# Altium PCB PCB2.PcbDoc
Units mm, origin at the board's own origin, x right, y up, seen from the top; angles counter-clockwise.
Board outline 100 x 120 mm, 2 copper layers (Top Layer, Bottom Layer); 99 components, 94 nets, 331 pads, 139 vias.
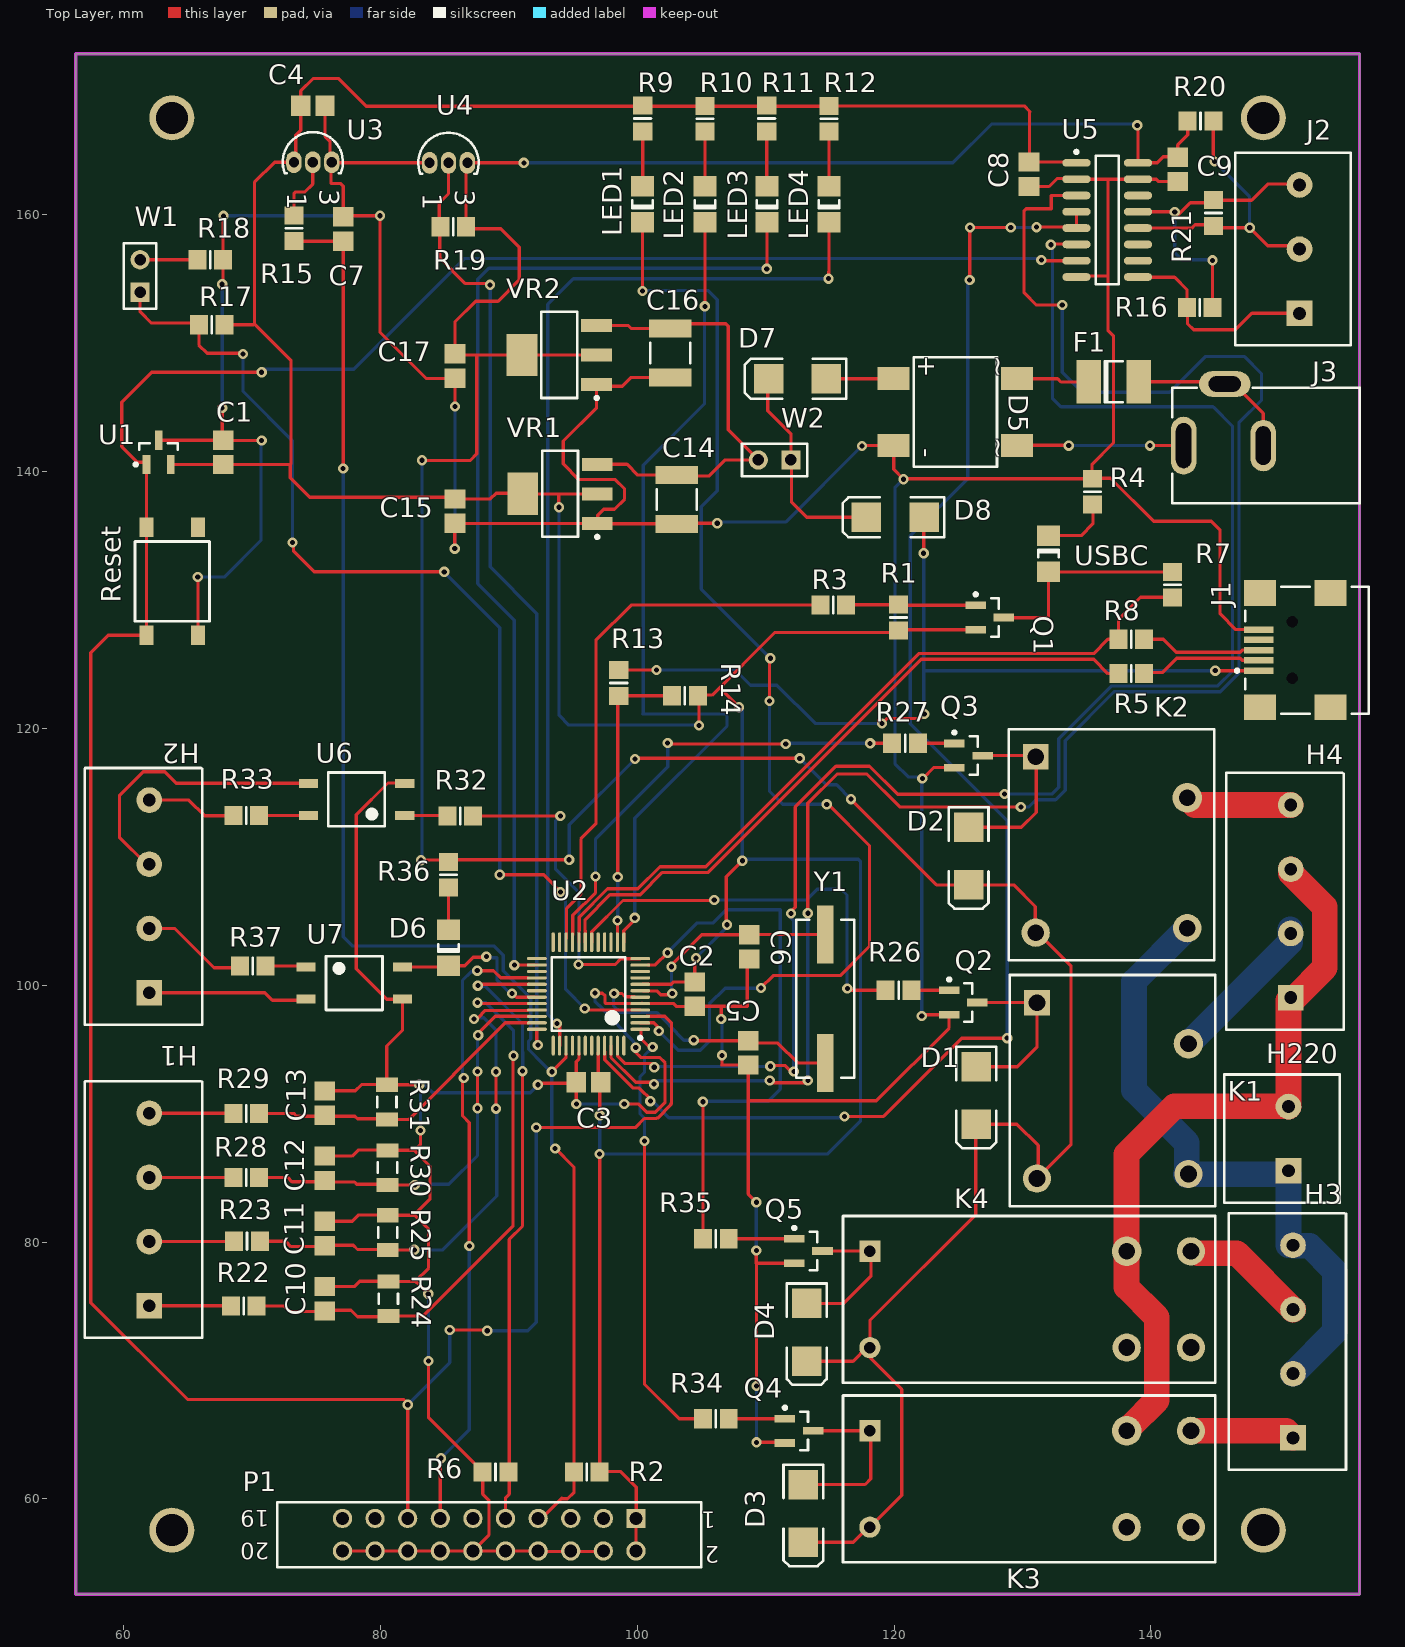
[diagram p0: Top Layer view]
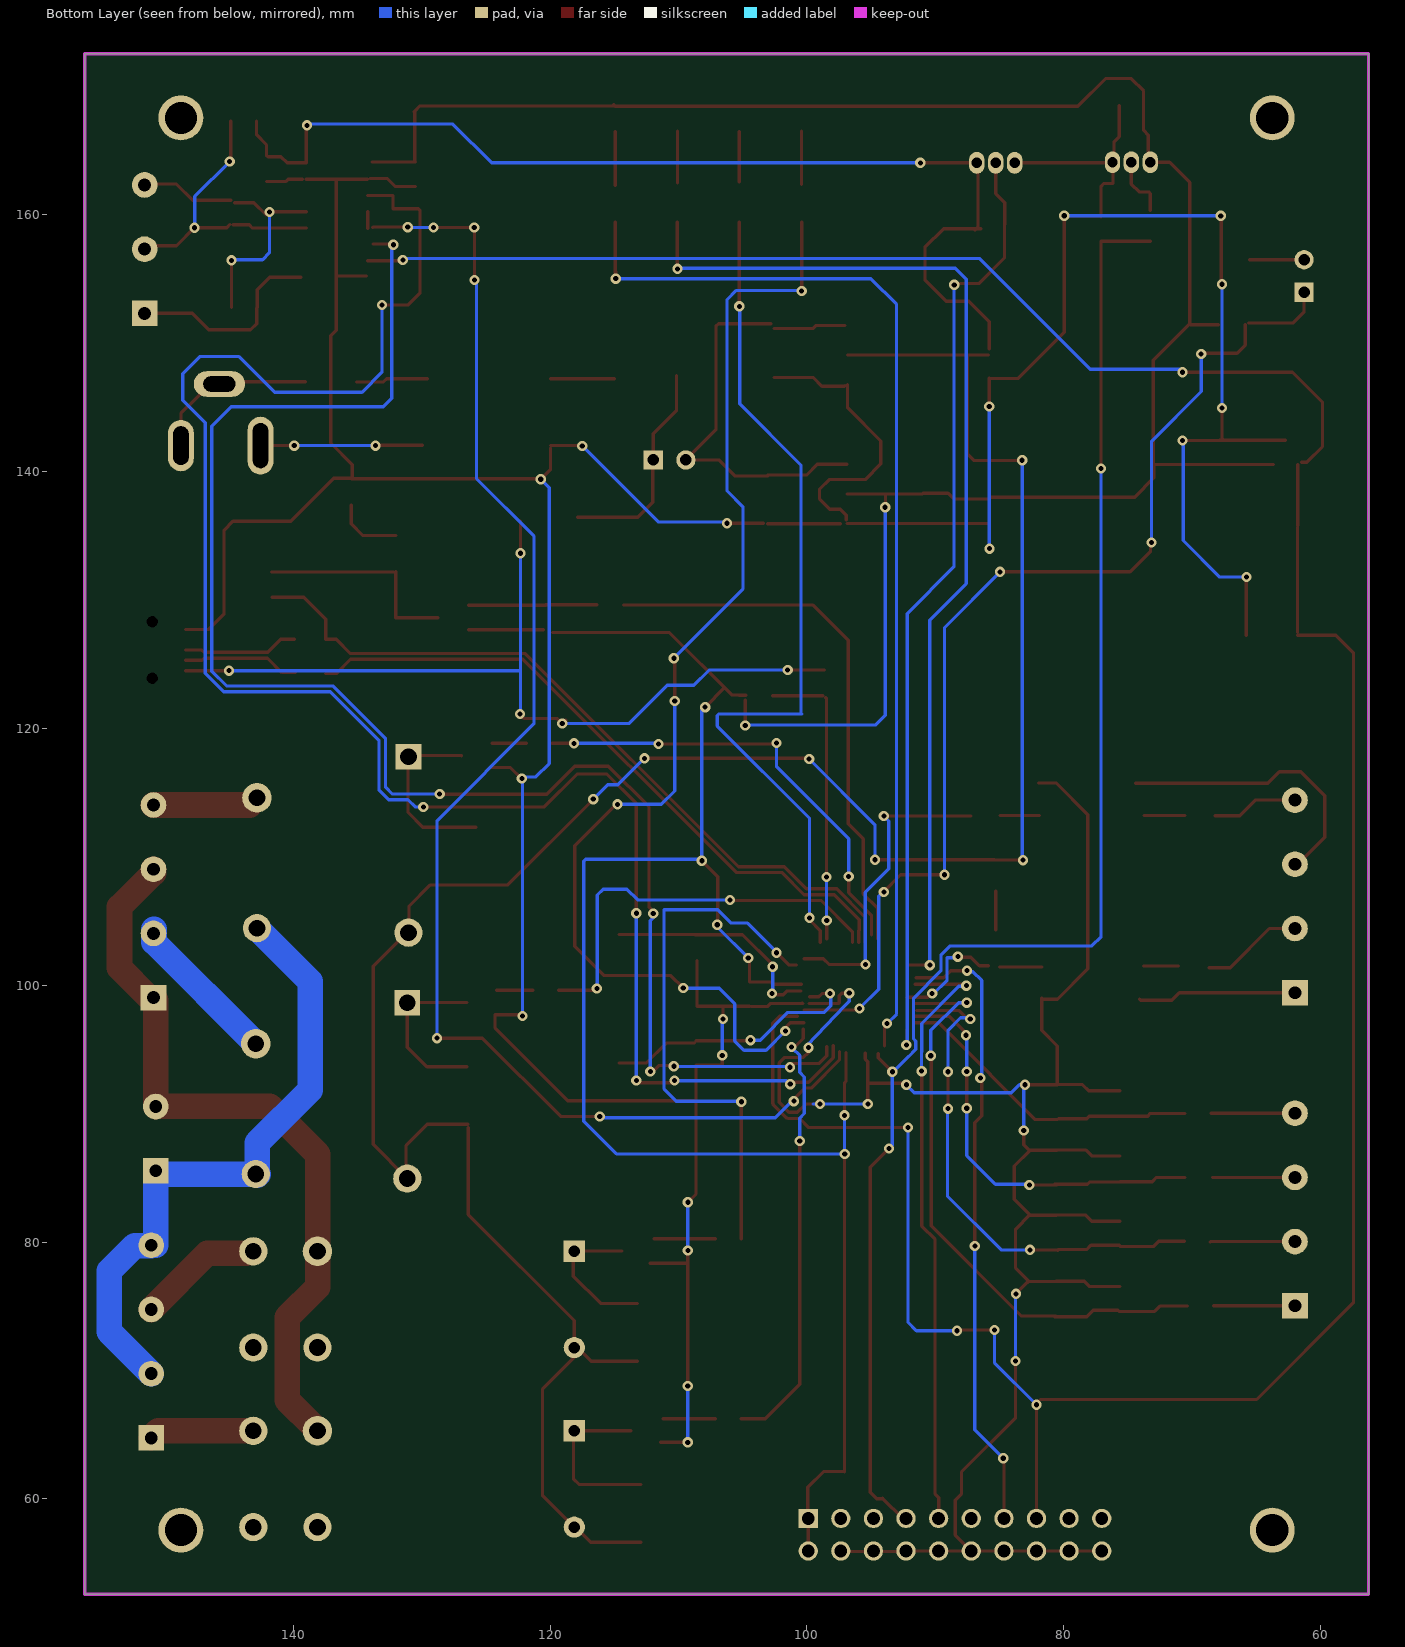
[diagram p1: Bottom Layer view, seen from below]

## Layer stack, top to bottom
Top Layer: signal copper 0.0356
Dielectric: dielectric 0.32, FR-4, Dk 4.8
Bottom Layer: signal copper 0.0356

## Board outline
56.253,52.566 56.253,172.566 156.253,172.566 156.253,52.566

## Design rules (kind name [scope] priority, off if disabled: settings)
AcuteAngle [All] p1: minimum=6.00000000000000E+0001
Clearance [All] p1: gap=0.2
DiffPairsRouting [(InNet('D_N') AND InNet('D_P'))] p1: maxlimit=0.254 minlimit=0.254 mostfreqgap=0.254 maxuncoupledlength=12.7
Height [All] p1: minheight=0 maxheight=26 prefheight=12.7
HoleSize [All] p1: absolutevalues=TRUE maxlimit=4.5 minlimit=0.4 maxpercent=80.000 minpercent=20.000
MinimumAnnularRing [All] p1: minimumring=0.2
MinimumSolderMaskSliver [All] p1: minsoldermaskwidth=0.1
PlaneClearance [All] p1: clearance=0.5
PolygonConnect [All] p1: connectstyle=Relief reliefconductorwidth=0.254 reliefentries=4 polygonreliefangle="90 Angle"
RoutingVias [All] p1: holewidth=0.5 width=0.9 viastyle="Through Hole" minholewidth=0.4 minwidth=0.8 maxholewidth=0.7 maxwidth=2.54
SilkToSilkClearance [All] p1 off: silktosilkclearance=0.254
SilkscreenOverComponentPads [All] p1 off: minsilkscreentomaskgap=0.254
SolderMaskExpansion [All] p1: expansion=0.2
ViasUnderSMD [All] p1: allowed=FALSE
Width 220V_relay [InNetClass('220V_r')] p1: maxlimit=2 minlimit=2 preferedwidth=2
Width "Power, GND nets" [(InNet('+3.3V') AND InNet('GND') AND InNet('GND485') AND InNet('VBUS') AND InNet('VCC5') AND InNet('VCC33'))] p2: maxlimit=0.4 minlimit=0.4 preferedwidth=0.4
Width [All] p3: maxlimit=0.254 minlimit=0.254 preferedwidth=0.254
21 further rules are at their usual default settings.

## Classes and differential pairs
net class 220V_r: H3_2 H4_1 NetH3_1 NetH3_3 NetH4_2 NetH4_4
component class Slave_Sheet2: C10 C11 C12 C13 C14 C15 C16 C17 D1 D2 D3 D4 D5 D6 D7 D8 F1 J3 K1 K2 K3 K4 Q2 Q3 Q4 Q5 R22 R23 R24 R25 R26 R27 R28 R29 R30 R31 R32 R33 R34 R35 R36 R37 U6 U7 VR1 VR2 W2
component class Sheet1: C1 C2 C3 C4 C5 C6 C7 C8 C9 H1 H2 H3 H4 H220 J1 J2 LED1 LED2 LED3 LED4 P1 Q1 R1 R2 R3 R4 R5 R6 R7 R8 R9 R10 R11 R12 R13 R14 R15 R16 R17 R18 R19 R20 R21 Reset U1 U2 U3 U4 U5 USBC W1 Y1
differential pair D2: +D2_P -D2_N
differential pair D1: +D1_P -D1_N

## Components (designator, comment, footprint, x,y, rotation, side; value= is the part's Value field where it differs from the comment)
C1 "Cap Semi" CAPC2012M 67.752,141.513 r270 top
C2 "Cap Semi" CAPC2012M 104.47,99.314 r90 top
C3 "Cap Semi" CAPC2012M 96.2,92.46 r0 top
C4 "Cap Semi" CAPC2012M 74.727,168.504 r180 top
C5 "Cap Semi" CAPC2012M 108.636,94.742 r90 top
C6 "Cap Semi" CAPC2012M 108.712,102.997 r90 top
C7 "Cap Semi" CAPC2012M 77.087,158.911 r270 top
C8 "Cap Semi" CAPC2012M 130.505,163.17 r270 top
C9 "Cap Semi" CAPC2012M 142.088,163.551 r90 top
C10 "Cap Semi" CAPC2012M 75.641,75.59 r270 top
C11 "Cap Semi" CAPC2012M 75.641,80.67 r270 top
C12 "Cap Semi" CAPC2012M 75.641,85.75 r270 top
C13 "Cap Semi" CAPC2012M 75.641,90.83 r270 top
C14 "Cap Pol3" CAPC4532L 103.073,137.846 r270 top
C15 "Cap Semi" CAPC2012M 85.801,136.931 r90 top
C16 "Cap Pol3" CAPC4532L 102.565,149.25 r270 top
C17 "Cap Semi" CAPC2012M 85.801,148.234 r90 top
D1 "SMBJ5.0CA" SMB 126.399,91.425 r270 top
D2 "SMBJ5.0CA" SMB 125.799,110.067 r270 top
D3 "SMBJ5.0CA" SMB 112.936,58.872 r270 top
D4 "SMBJ5.0CA" SMB 113.194,72.976 r270 top
D5 "Bridge1" DB-1S 124.765,144.653 r90 top
D6 "LED2" CD3216-1206 85.293,102.914 r270 top
D7 "SMBJ5.0CA" SMB 112.471,147.244 r180 top
D8 "SMBJ5.0CA" SMB 120.091,136.449 r180 top
F1 "Fuse 2" CD4532-1812 137.109,147.015 r180 top
H1 "Klemnik4_my" Klemnik4_5mm 65.989,72.542 r90 top
H2 "Klemnik4_my" Klemnik4_5mm 65.989,96.926 r90 top
H3 "Klemnik4_my" Klemnik4_5mm 155.067,62.255 r90 top
H4 "Klemnik4_my" Klemnik4_5mm 154.889,96.545 r90 top
H220 "Header 2" Klemnik2_5mm 154.711,83.058 r90 top
J1 "USB-B" "MINI USB" 156.253,126.111 r0 top
J2 "CON3" Klemnik3_5mm 155.577,149.838 r90 top
J3 "PWR2.5" KLD-0202 156.253,142.037 r180 top
K1 "Relay-5VDC-10A" TRCF-SB 137.023,91.803 r270 top
K2 "Relay-5VDC-10A" TRCF-SB 136.931,110.953 r270 top
K3 "Relay-5VDC-16A" TRIH-AE 130.518,61.554 r0 top
K4 "Relay-5VDC-16A" TRIH-AE 130.518,75.536 r0 top
LED1 "LED2" CD3216-1206 100.408,160.84 r270 top
LED2 "LED2" CD3216-1206 105.263,160.84 r270 top
LED3 "LED2" CD3216-1206 110.093,160.84 r270 top
LED4 "LED2" CD3216-1206 114.923,160.84 r270 top
P1 "JTAG20" JTAG_SWD_2.54 99.896,58.482 r180 top
Q1 "MMBT2907LT1" SOT23_M 127.457,128.651 r0 top
Q2 "PMBT5551" SOT23_M 125.383,98.658 r0 top
Q3 "PMBT5551" SOT23_M 125.799,117.891 r0 top
Q4 "PMBT5551" SOT23_M 112.594,65.304 r0 top
Q5 "PMBT5551" SOT23_M 113.322,79.302 r0 top
R1 "Res Semi" RESC2012M 120.345,128.651 r270 top
R2 "Res Semi" RESC2012M 96.068,62.102 r180 top
R3 "Res Semi" RESC2012M 115.265,129.616 r180 top
R4 "Res Semi" RESC2012M 135.458,138.455 r270 top
R5 "Res Semi" RESC2012M 138.481,124.282 r0 top
R6 "Res Semi" RESC2012M 88.956,62.102 r180 top
R7 "Res Semi" RESC2012M 141.681,131.191 r90 top
R8 "Res Semi" RESC2012M 138.481,126.949 r0 top
R9 "Res Semi" RESC2012M 100.413,167.512 r270 top
R10 "Res Semi" RESC2012M 105.263,167.495 r270 top
R11 "Res Semi" RESC2012M 110.073,167.512 r90 top
R12 "Res Semi" RESC2012M 114.923,167.495 r270 top
R13 "Res Semi" RESC2012M 98.552,123.546 r90 top
R14 "Res Semi" RESC2012M 103.708,122.555 r180 top
R15 "Res Semi" RESC2012M 73.265,158.961 r90 top
R16 "Res Semi" RESC2012M 143.813,152.792 r180 top
R17 "Res Semi" RESC2012M 66.853,151.46 r0 top
R18 "Res Semi" RESC2012M 66.734,156.515 r180 top
R19 "Res Semi" RESC2012M 85.663,159.089 r0 top
R20 "Res Semi" RESC2012M 143.863,167.314 r0 top
R21 "Res Semi" RESC2012M 144.875,160.154 r270 top
R22 "Res Semi" RESC2012M 69.351,75.022 r180 top
R23 "Res Semi" RESC2012M 69.599,80.079 r180 top
R24 "Res Varistor" RESC3216L 80.613,75.59 r270 top
R25 "Res Varistor" RESC3216L 80.569,80.747 r270 top
R26 "Res Semi" RESC2012M 120.345,99.619 r180 top
R27 "Res Semi" RESC2012M 120.853,118.847 r180 top
R28 "Res Semi" RESC2012M 69.545,85.039 r180 top
R29 "Res Semi" RESC2012M 69.545,90.022 r180 top
R30 "Res Varistor" RESC3216L 80.543,85.801 r270 top
R31 "Res Varistor" RESC3216L 80.493,90.911 r270 top
R32 "Res Semi" RESC2012M 86.217,113.182 r0 top
R33 "Res Semi" RESC2012M 69.545,113.233 r0 top
R34 "Res Semi" RESC2012M 106.121,66.243 r180 top
R35 "Res Semi" RESC2012M 106.121,80.264 r180 top
R36 "Res Semi" RESC2012M 85.293,108.61 r270 top
R37 "Res Semi" RESC2012M 70.053,101.498 r180 top
Reset "Reset" BUTTON 63.779,131.47 r270 top
U1 "MCP130T-300I/TT" SOT-23-TT3_N 62.722,141.513 r90 top
U2 "LPC1343FBD48" LQFP48_L 96.2,99.33 r180 top
U3 "TMP35" PR35 74.727,164.109 r270 top
U4 "DS1820" PR35 85.293,164.059 r270 top
U5 "ADM2483" SO16_N 136.601,159.614 r0 top
U6 "KPC357" Micro-Flat 78.135,114.479 r180 top
U7 "KPC357" Micro-Flat 77.953,100.178 r0 top
USBC "LED2" CD3216-1206 132.029,133.629 r90 top
VR1 "LM1117IMP-3.3" MP04A_N 93.98,138.278 r180 top
VR2 "LM1117IMP-5.0" MP04A_N 93.929,149.098 r180 top
W1 "Jumper" HDR1X2 61.273,153.975 r90 top
W2 "Button_inner" HDR1X2 111.963,140.919 r180 top
Y1 "12MZ" HC-49SM 114.63,98.958 r270 top

## Footprints (in the part's own frame and the unit in brackets; to place one, negate y for a bottom-side part, rotate by r counter-clockwise, add the part's x,y. Pads: shape width x height; smd on the part's side, far side on the other; paste and mask are expansions set on the pad)
BUTTON [mm] "DTSGL-61M"
  rect 1.5x1.1 smd: 1(-4.2,2) 2(4.2,2) 3(-4.2,-2) 4(4.2,-2)
  silkscreen extent -3.1,-2.9 3.1,2.9
CAPC2012M [mm] "Chip Capacitor, Body 2.0x1.3mm, IPC Low Density"
  rect 1.5x1.6 smd: 1(-0.95,0) 2(0.95,0)
  body extent -1.1,-0.72 1.1,0.72, height 1.1
CAPC4532L [mm] "Chip Capacitor, Body 4.5x3.2mm, IPC High Density"
  rect 1.4x3.3 smd: 1(-1.9,0) 2(1.9,0)
  silkscreen extent -0.8,-1.55 0.8,1.55, body extent -2.4,-1.7 2.4,1.7, height 1.4
CD3216-1206 [mm] "Chip Diode; Body 3.2 x 1.6 mm (LxW typ)"
  rect 1.6x1.8 smd: 1(-1.4,0) 2(1.4,0)
  silkscreen extent -0.3,-0.8 0.3,0.8
CD4532-1812 [mm] "Chip Diode; Body 4.5 x 3.2 mm (LxW typ)"
  rect 1.9x3.4 smd: 1(-1.95,0) 2(1.95,0)
  silkscreen extent -0.7,-1.6 0.7,1.6
DB-1S [mm] "Bridge Rectifier; 4 Terminals;"
  rect 1.8x2.5 smd: 1(2.6,4.8) 2(-2.6,-4.8) 3(-2.6,4.8) 4(2.6,-4.8)
  silkscreen extent -4.25,-3.25 4.25,3.25, body extent -4.29,-3.25 4.32,3.22, height 2.5
HC-49SM [mm] "Quartz Crystal,"
  rect 4.5x1.3 smd: 1(-5,0) 2(5,0)
  silkscreen extent -6.15,-2.25 6.15,2.25
HDR1X2 [mm] "Connector; Header; 2 Position"
  rect 1.5x1.5 hole 0.9: 1(0,0)
  round 1.5 hole 0.9: 2(2.54,0)
  silkscreen extent -1.27,-1.27 3.81,1.27
JTAG_SWD_2.54 [mm] "Connector; Header; 10x2 Position"
  rect 1.5x1.5 hole 1: 1(0,0)
  round 1.5 hole 1: 2(0,2.54) 3(2.54,0) 4(2.54,2.54) 5(5.08,0) 6(5.08,2.54) 7(7.62,0) 8(7.62,2.54) 9(10.16,0) 10(10.16,2.54) 11(12.7,0) 12(12.7,2.54) 13(15.24,0) 14(15.24,2.54) 15(17.78,0) 16(17.78,2.54) 17(20.32,0) 18(20.32,2.54) 19(22.86,0) 20(22.86,2.54)
  silkscreen extent -5.08,-1.27 27.94,3.81
KLD-0202 [mm]
  oval 2x4.5 hole 1.2 slot 3.5 at 90 deg: 1(13.7,0)
  oval 2x4 hole 1.2 slot 3 at 90 deg: 2(7.5,0)
  oval 4x2 hole 1.2 slot 2.5 at 0 deg: 3(10.5,-4.8)
  silkscreen extent 0,-4.5 14.6,4.5
Klemnik2_5mm [mm] "Connector; Header; 2 Position"
  rect 2x2 hole 1: 1(2.5,4)
  round 2 hole 1: 2(7.5,4)
  silkscreen extent 0,0 10,9
Klemnik3_5mm [mm] "Connector; Header; 3 Position"
  rect 2x2 hole 1: 1(2.5,4)
  round 2 hole 1: 2(7.5,4) 3(12.5,4)
  silkscreen extent 0,0 15,9.02
Klemnik4_5mm [mm] "Connector; Header; 8 Position"
  rect 2x2 hole 1: 1(2.5,4)
  round 2 hole 1: 2(7.5,4) 3(12.5,4) 4(17.5,4)
  silkscreen extent 0,-0.13 20,9.02
LQFP48_L [mm] "Thin QFP, 48-Leads, Body 7x7mm, Pitch 0.5mm, IPC High Density"
  oval 1.55x0.25 smd: 1(-4.025,2.75) 2(-4.025,2.25) 3(-4.025,1.75) 4(-4.025,1.25) 5(-4.025,0.75) 6(-4.025,0.25) 7(-4.025,-0.25) 8(-4.025,-0.75) 9(-4.025,-1.25) 10(-4.025,-1.75) 11(-4.025,-2.25) 12(-4.025,-2.75) 25(4.025,-2.75) 26(4.025,-2.25) 27(4.025,-1.75) 28(4.025,-1.25) 29(4.025,-0.75) 30(4.025,-0.25) 31(4.025,0.25) 32(4.025,0.75) 33(4.025,1.25) 34(4.025,1.75) 35(4.025,2.25) 36(4.025,2.75)
  oval 0.25x1.55 smd: 13(-2.75,-4.025) 14(-2.25,-4.025) 15(-1.75,-4.025) 16(-1.25,-4.025) 17(-0.75,-4.025) 18(-0.25,-4.025) 19(0.25,-4.025) 20(0.75,-4.025) 21(1.25,-4.025) 22(1.75,-4.025) 23(2.25,-4.025) 24(2.75,-4.025) 37(2.75,4.025) 38(2.25,4.025) 39(1.75,4.025) 40(1.25,4.025) 41(0.75,4.025) 42(0.25,4.025) 43(-0.25,4.025) 44(-0.75,4.025) 45(-1.25,4.025) 46(-1.75,4.025) 47(-2.25,4.025) 48(-2.75,4.025)
  silkscreen extent -4.15,-2.85 2.85,3.55, body extent -3.5,-3.5 3.5,3.5, height 1.6
Micro-Flat [mm] "Micro-Flat"
  rect 1.5x0.7 smd: 1(-3.75,1.257) 2(-3.75,-1.257) 3(3.75,-1.257) 4(3.75,1.257)
  silkscreen extent -2.2,-2.1 2.2,2.1, body extent -2.67,-2.41 2.67,2.41, height 2.3
"MINI USB" [mm] "Connector; USB2.0, Type A, SM; 5 Position; Right Angle"
  rect 2.3x0.5 smd: 1(-7.85,-1.6) 2(-7.85,-0.8) 3(-7.85,0) 4(-7.85,0.8) 5(-7.85,1.6)
  rect 2.5x2 smd: 6(-7.75,4.45) 7(-2.25,4.45) 8(-7.75,-4.45) 9(-2.25,-4.45)
  round 0.6 hole 0.9 unplated: MH1(-5.25,2.2) MH2(-5.25,-2.2)
  silkscreen extent -9.67,-4.95 0.7,4.95
MP04A_N [mm] "SOT223, 4-Leads, Body 6.5x3.5mm, Pitch 2.3mm, Lead Span 7mm, IPC Medium Density"
  rect 2.4x1 smd: 1(-2.9,2.3) 2(-2.9,0) 3(-2.9,-2.3)
  rect 2.4x3.3 smd: 4(2.9,0)
  silkscreen extent -3.03,-3.35 1.4,3.47, body extent -1.85,-3.35 1.85,3.35, height 1.8
PR35 [mm] "TO, Flat Index; 3 In-Line, Axial Leads; Body Dia. 4.6mm; Leads 0.56 x 0.51 mm (max)"
  oval 1.7x1.2 hole 0.8: 1(0,-1.473) 2(0,0) 3(0,1.473)
  silkscreen extent -2.34,-2.35 0.85,2.35
RESC2012M [mm] "Chip Resistor, Body 2.0x1.3mm, IPC Low Density"
  rect 1.4x1.5 smd: 1(-1,0) 2(1,0)
  silkscreen extent 0,-0.65 0,0.65, body extent -1.07,-0.7 1.07,0.7, height 0.65
RESC3216L [mm] "Chip Resistor, Body 3.1x1.6mm, IPC High Density"
  rect 1.1x1.7 smd: 1(-1.35,0) 2(1.35,0)
  silkscreen extent -0.4,-0.75 0.4,0.75, body extent -1.68,-0.87 1.68,0.87, height 2.54
SMB [mm] "DO-214-AA/SMB; 2 C-Bend Leads; Body 5.3 x 3.6 mm, inc. leads (LxW)"
  rect 2.3x2.3 smd: 1(-2.25,0) 2(2.25,0)
  silkscreen extent -3.8,-1.55 4.1,1.55
SO16_N [mm] "SOIC, 16-Leads, Body 9.9x3.9mm, Pitch 1.27mm, IPC Medium Density"
  oval 2.2x0.6 smd: 1(-2.4,4.445) 2(-2.4,3.175) 3(-2.4,1.905) 4(-2.4,0.635) 5(-2.4,-0.635) 6(-2.4,-1.905) 7(-2.4,-3.175) 8(-2.4,-4.445) 9(2.4,-4.445) 10(2.4,-3.175) 11(2.4,-1.905) 12(2.4,-0.635) 13(2.4,0.635) 14(2.4,1.905) 15(2.4,3.175) 16(2.4,4.445)
  silkscreen extent -2.52,-5 0.9,5.42, body extent -1.95,-4.95 1.95,4.95, height 1.75
SOT23_M [mm] "SOT23, 3-Leads, Body 2.9x1.3mm, Pitch 0.95mm, Lead Span 2.3mm, IPC Low Density"
  rect 1.6x0.6 smd: 1(-1.1,0.95) 2(-1.1,-0.95) 3(1.1,0)
  silkscreen extent -1.22,-1.5 0.7,1.92, body extent -0.7,-1.5 0.7,1.5, height 1.1
SOT-23-TT3_N [mm] "SOT23, 3-Leads, Body 2.9x1.3mm, Pitch 0.95mm, Lead Span 2.4mm, IPC Medium Density"
  rect 1.5x0.6 smd: 1(-0.95,0.95) 2(-0.95,-0.95) 3(0.95,0)
  silkscreen extent -1.07,-1.5 0.7,1.92, body extent -0.7,-1.5 0.7,1.5, height 1.12
TRCF-SB [mm] "DIP; 5 Round Pins; Row Space 15.24 mm; Pitch 5 mm"
  rect 2x2 hole 1.3: 1(-6.85,-5.9)
  round 2.2 hole 1.3: 2(6.85,-5.9) 4(6.5,5.9)
  round 2.3 hole 1.3: 3(-3.65,5.9)
  silkscreen extent -9,-8 9,8
TRIH-AE [mm] "DIP; 5 Round Pins; Row Space 15.24 mm; Pitch 5 mm"
  rect 1.65x1.65 hole 0.9: 1(-12.4,3.75)
  round 2.3 hole 1.3: 3(7.6,3.75)
  round 2.2 hole 1.3: 4(12.6,3.75) 5(12.6,-3.75) 6(7.6,-3.75)
  round 1.65 hole 0.9: 8(-12.4,-3.75)
  silkscreen extent -14.5,-6.5 14.5,6.5

## Part data
C1 C2 C3 C4 C5 C6 C7 C8 C9 C10 C11 C12 C13 C15 C17: "Capacitor (Semiconductor SIM Model)"
C14 C16: "Polarized Capacitor (Surface Mount)"
D1 D2 D3 D4 D7 D8: library part "Diode 1N4007", "1 Amp General Purpose Rectifier"
D5: "Full Wave Diode Bridge"
D6 LED1 LED2 LED3 LED4 USBC: "Typical RED, GREEN, YELLOW, AMBER GaAs LED"
F1: "Fuse"
H1 H2 H3 H4: "Header, 4-Pin, 300-041-12"
H220: "Header, 2-Pin"
J1: library part "USB connector 5", "USB connector, 5-Pin"
J2: library part "RS485 Klemnik 3", "Header, 3-Pin"
J3: "Low Voltage Power Supply Connector"
K1 K2: "TRCF-5VDC-SB-A"
K3 K4: "TRIH-5VDC-SD-1AE-R"
P1: library part "Header 10X2", "Header, 10-Pin, Dual row"
Q1: "General Purpose Transistor PNP Silicon"
Q2 Q3 Q4 Q5: "NPN Switching Transistor"
R1 R2 R3 R4 R5 R6 R7 R8 R9 R10 R11 R12 R13 R14 R15 R16 R17 R18 R19 R20 R21 R22 R23 R26 R27 R28 R29 R32 R33 R34 R35 R36 R37: "Semiconductor Resistor"
R24 R25 R30 R31: "Varistor (Voltage-Sensitive Resistor)"
Reset: library part BUTTON, "DTSGL-61M"
U1: "Microcontroller Supervisory Circuit with Open Drain Output, 3-Pin SOT-23, Industrial Temperature, Tape and Reel"
U2: "ARM-based 32-bit MCU with 64 Kbytes Flash, 48-pin LQFP, Industrial Temperature"
U4: "1-Wire Digital Thermometer"
U5: "isolated rs-485 driver"
U6 U7: library part Optoisolator1, "4-Pin Phototransistor Optocoupler"
VR1 VR2: "800mA Low-Dropout Linear Regulator"
W1: "Jumper Wire"
W2: "Power Button"
Y1: library part XTAL, "Crystal Oscillator"

## Free pads (board coordinates)
  round 3.5 hole 2.5 unplated: 0(63.753,57.566) 0(63.753,167.566) 0(148.753,57.566) 0(148.753,167.566)

## Via types
v1: diameter 0.8, hole 0.4, Top Layer to Bottom Layer, 139 vias

## Nets (pads, with @x,y where several pads share a name; then routed paths per layer and width w, separated by ;. In a path a pad name is that pad's centre, name@x,y a point inside that pad or via, vN(x,y) a via of type N, cw(c..) or ccw(c..) an arc to the next point about the centre after c; other vN are vias at no path point)
D1_N: R5.1 U2.19 | length 52.2
  Top Layer w0.254: U2.19 95.95,104.267 95.927,104.29 95.927,105.122 97.866,107.061 100.225,107.061 101.956,108.791 105.515,108.791 122.112,125.389 135.545,125.389 136.652,124.282 R5.1
D1_P: R7.1 R8.1 U2.20 | length 59.4
  Top Layer w0.254: U2.20 95.45,104.267 95.473,104.29 95.473,105.31 97.678,107.515 100.037,107.515 101.768,109.245 105.327,109.245 121.924,125.843 135.545,125.843 136.652,126.949 R8.1 137.481,128.515 139.192,130.226 R7.1@141.63,130.226
D2_N: J1.2 R5.2 | length 9.1
  Top Layer w0.254: R5.2@139.827,124.358 140.886,124.358 142.011,125.484 146.944,125.484 147.117,125.311 J1.2
D2_P: J1.3 R8.2 | length 9
  Top Layer w0.254: R8.2@139.903,126.949 140.97,126.949 141.981,125.938 146.944,125.938 147.117,126.111 J1.3
GND: C1.1 C2.1 C3.1 C4.1 C5.1 C6.1 C7.1 C8.2 C9.1 C10.1 C11.1 C12.1 C13.1 C14.2 C15.1 C16.2 C17.1 D5.3 J1.5 P1.4 P1.6 P1.8 P1.10 P1.12 P1.14 P1.16 P1.18 P1.20 Q2.2 Q3.2 Q4.2 Q5.2 R4.1 R6.2 R18.1 R24.1 R25.1 R30.1 R31.1 Reset.2 U1.3 U2.5 U2.41 U3.3 U4.1 U5.2 U5.8 U5.15 U6.2 U7.3 VR1.1 VR2.1 | length 522.5
  Top Layer w0.254: U1.3 C1.1@67.589,142.463 ; v1(65.761,131.801) 65.779,131.782 Reset.2 ; C1.1@67.589,142.545 67.691,142.443 v1(70.739,142.443) ; C1.1@67.666,142.646 v1(67.666,144.958) ; v1(67.666,154.61) 67.734,154.678 R18.1 67.734,159.901 v1(67.767,159.934) ; C1.1 C1.1@67.838,142.463 ; C10.1 77.963,76.54 78.384,76.962 R24.1@80.569,76.962 ; C11.1 77.81,81.62 78.308,82.118 R25.1@80.543,82.118 ; C12.1 77.785,86.7 78.257,87.173 R30.1@80.645,87.173 ; C13.1 78.039,91.78 78.537,92.278 R31.1@80.493,92.278 ; C4.1 75.677,166.106 76.073,165.71 U3.3@76.073,164.236 ; U3.3@76.149,164.008 76.149,162.458 76.86,162.458 77.087,162.232 C7.1 ; U3.3@76.251,164.059 U4.1@83.922,164.059 ; P1.20 P1.18 P1.16 P1.14 P1.12 ; C7.1@77.191,159.944 v1(79.959,159.944) 79.959,150.851 83.541,147.269 C17.1@85.7,147.269 ; R30.1 82.681,87.151 83.109,87.579 v1(83.109,88.697) ; R25.1 82.605,82.097 82.626,82.118 ; R24.1 82.706,76.94 83.744,77.978 83.744,81.001 82.626,82.118 ; U7.3 80.48,98.921 78.117,101.283 78.117,113.296 80.582,115.761 U6.2@81.953,115.761 ; U7.3@81.712,99.009 81.712,96.495 80.493,95.275 R31.1@80.493,92.278 ; 82.652,87.122 83.845,85.928 83.845,83.337 82.626,82.118 ; 82.779,76.86 82.829,76.86 v1(83.718,75.971) ; v1@82.999,92.261 R31.1 R31.1@80.493,92.278 ; v1(83.744,70.739) 83.744,66.314 R6.2 ; v1(85.776,134.01) C15.1@85.776,135.788 ; v1(85.801,145.085) C17.1 ; C15.1@85.891,135.978 VR1.1 ; R6.2@87.96,62.001 87.96,60.376 88.443,59.893 88.443,57.188 P1.12 ; v1(92.253,92.253) 92.38,92.38 C3.1@95.25,92.38 ; v1(95.25,90.754) C3.1 95.25,94.056 95.453,94.259 U2.41@95.453,94.717 ; v1(96.698,99.39) 97.282,99.39 97.485,99.187 97.485,98.628 97.536,98.577 U2.5@99.822,98.577 ; VR2.1 96.829,144.988 94.238,142.397 94.238,140.61 95.453,139.395 98.273,139.395 99.009,138.659 99.009,137.871 98.222,137.084 97.384,137.084 96.926,136.627 VR1.1@96.926,136.271 ; VR2.1@97.028,146.71 97.079,146.66 98.831,146.66 99.522,147.35 C16.2 ; VR1.1@97.379,135.946 C14.2 ; P1.4@97.46,55.905 92.38,55.905 92.344,55.942 P1.8 P1.10 P1.12 ; v1(98.984,90.754) 99.517,90.754 100.101,90.754 100.736,90.119 101.397,90.119 102.159,90.881 102.159,93.955 101.727,94.386 100.267,94.386 v1@99.898,94.755 ; U2.5@100.355,98.603 100.33,98.577 102.845,98.577 103.073,98.349 C2.1@104.343,98.349 ; C14.2@103.378,135.992 v1(106.223,135.992) ; C2.1 108.56,98.364 C6.1@108.56,101.93 ; v1(106.528,97.384) 106.528,98.196 ; 106.578,93.802 106.589,93.792 ; v1(106.589,94.549) 106.589,93.792 ; 108.687,91.008 118.618,91.008 124.283,96.673 Q2.2 122.244,97.708 v1(122.149,97.612) ; 109.271,78.359 v1(109.271,79.35) ; v1(109.271,83.109) 108.636,83.744 C5.1 106.589,93.792 ; v1(109.278,68.79) 109.278,78.352 Q5.2 ; v1@109.372,64.313 v1(109.278,64.408) Q4.2@111.386,64.408 ; v1(117.5,142.011) 117.542,142.053 D5.3 ; D5.3@119.964,141.859 119.964,140.183 v1@120.691,139.455 ; v1(120.726,139.421) v1@120.691,139.455 ; v1(122.199,116.103) 122.225,116.103 123.088,116.967 124.511,116.967 Q3.2@124.511,117.043 ; C8.2 132.07,162.22 132.69,162.839 U5.2@134.01,162.839 ; U5.2@134.239,162.789 136.652,162.789 ; U5.8@134.315,155.245 136.652,155.245 ; R4.1@135.407,139.649 135.407,140.564 137.084,142.24 137.084,150.597 136.652,151.028 136.652,155.245 ; R4.1 v1@120.691,139.455 ; R4.1@135.611,139.497 136.855,139.497 140.208,136.144 144.704,136.144 145.39,135.458 145.39,128.93 146.609,127.711 J1.5 ; U5.15 136.652,162.789 ; U5.15@139.294,162.789 140.411,162.789 140.599,162.601 C9.1 ; 136.652,155.245 136.652,162.789
  Bottom Layer w0.254: v1(65.761,131.801) 67.843,131.801 70.688,134.645 70.688,142.392 v1(70.739,142.443) ; v1(67.666,144.958) v1(67.666,154.61) ; v1(67.767,159.934) 79.95,159.934 v1(79.959,159.944) ; v1(83.007,92.253) v1@83.109,92.151 ; v1(83.109,88.697) v1@83.109,92.151 ; v1@83.109,92.202 v1@83.109,92.151 ; v1@83.21,92.253 83.448,92.253 84.074,91.627 91.567,91.627 ; v1(83.718,75.971) 83.744,75.946 v1(83.744,70.739) ; v1(85.776,134.01) 85.801,134.036 v1(85.801,145.085) ; 91.567,91.643 91.567,91.627 ; v1@92.253,92.227 91.652,91.627 91.567,91.627 ; v1(95.25,90.754) 99.517,90.754 v1(98.984,90.754) ; v1(96.698,99.39) 96.698,98.755 97.003,98.45 ; 97.028,98.438 v1@100.009,95.309 ; v1(106.223,135.992) 106.324,136.093 111.582,136.093 v1(117.5,142.011) ; v1(106.528,97.384) 106.589,97.323 v1(106.589,94.549) ; v1(109.271,83.109) v1(109.271,79.35) v1@109.296,79.375 ; v1(109.278,64.408) v1(109.278,68.79) ; v1(120.726,139.421) 120.066,138.76 120.066,117.272 121.107,116.23 v1@122.225,116.23 ; v1(122.149,97.612) 122.149,116.053 v1(122.199,116.103)
  other v1: 99.873,95.148
GND485: J2.1 R16.2 U5.9 | length 15.9
  Top Layer w0.254: U5.9@139.407,155.157 141.845,155.157 142.813,154.19 R16.2 ; R16.2@142.85,152.756 142.85,151.536 143.332,151.054 146.583,151.054 147.868,152.338 J2.1
H3_2: H3.2 H3.4 H220.1 K1.4 K2.4 | length 60
  Bottom Layer w2: K1.4@142.723,85.293 K1.4@142.799,85.293 ; K1.4@142.799,85.217 K1.4@142.799,85.293 ; K2.4 138.684,100.306 138.684,91.846 142.799,87.732 ; H3.4@150.711,79.755 H220.1@150.711,85.293 ; H3.2 154.33,73.019 154.33,77.749 152.349,79.731 H3.4@151.079,79.731 ; K1.4@142.799,85.293 H220.1@150.711,85.293 ; K1.4@142.799,85.293 142.799,87.732 ; K1.4@142.799,85.293 142.923,85.293 H220.1@150.711,85.293 ; K1.4@142.799,85.293 142.799,85.303 142.799,87.732
H4_1: H4.1 H4.3 H220.2 K3.3 K4.3 | length 57.2
  Top Layer w2: K3.3@138.379,65.608 140.462,67.691 140.462,74.143 138.1,76.505 138.1,79.286 138.1,86.843 141.834,90.576 H220.2@150.368,90.576 ; H220.2 H4.1@150.711,98.819 ; H4.3 150.889,108.75 153.543,106.096 153.543,101.371 H4.1@151.232,99.06
NetC5_2: C5.2 U2.6 Y1.2 | length 20.4
  Top Layer w0.254: v1@98.425,99.365 v1(98.196,99.365) 98.806,99.365 99.06,99.111 U2.6@99.771,99.111 ; v1@104.43,95.692 C5.2 ; C5.2@108.763,95.504 110.947,95.504 112.493,93.958 Y1.2
  Bottom Layer w0.254: v1@98.146,99.187 98.146,98.4 98.654,97.892 98.704,97.892 ; 98.781,97.892 101.498,97.892 102.514,96.876 ; 102.514,96.85 103.632,95.733 v1@104.115,95.733
  other v1: 104.394,95.733
NetC6_2: C6.2 U2.7 Y1.1 | length 17.9
  Top Layer w0.254: U2.7@100.457,99.568 101.524,99.568 101.829,99.263 102.667,99.263 102.768,99.365 v1@102.794,99.365 ; v1(102.667,101.448) 102.667,101.6 105.014,103.947 C6.2 ; C6.2@108.759,103.958 Y1.1
  Bottom Layer w0.254: v1(102.667,101.448) 102.667,99.263 102.768,99.365 v1@102.794,99.365
  other v1: 102.718,99.365
NetC14_1: C14.1 C16.1 VR1.3 VR2.3 W2.2 | length 34.8
  Top Layer w0.254: VR1.3 99.198,140.578 100.03,139.746 C14.1 ; VR2.3@97.028,151.384 99.314,151.384 99.548,151.15 C16.1 ; C16.1@102.819,151.536 106.883,151.536 107.086,151.333 107.086,143.256 W2.2 106.858,140.919 105.613,139.675 C14.1@103.022,139.675
NetD1_1: D1.1 K1.1 Q2.3 | length 18.2
  Top Layer w0.254: D1.1@126.467,93.65 129.591,93.65 131.123,95.182 K1.1 ; K1.1@131.123,98.658 Q2.3 K1.1@131.237,98.658
NetD2_1: D2.1 K2.1 Q3.3 | length 13.7
  Top Layer w0.254: D2.1 129.92,112.317 131.064,113.462 131.064,117.602 K2.1@131.14,117.678 ; Q3.3 126.915,117.907 K2.1@130.632,117.907
NetD3_1: D3.1 K3.1 Q4.3 | length 13.1
  Top Layer w0.254: D3.1 117.739,61.122 118.186,61.57 K3.1@118.186,65.126 ; Q4.3 K3.1@117.83,65.304
NetD4_1: D4.1 K4.1 Q5.3 | length 11.5
  Top Layer w0.254: D4.1 116.07,75.226 118.195,77.351 K4.1@118.195,79.189 ; Q5.3 K4.1@118.183,79.302
NetD5_1: D5.1 D7.1 | length 5
  Top Layer w0.254: D7.1@114.995,147.253 D5.1
NetD5_2: D5.2 J3.1 | length 12.6
  Top Layer w0.254: D5.2@129.946,142.062 133.579,142.062 v1(133.604,142.037) ; v1(139.929,142.037) J3.1
  Bottom Layer w0.254: v1(133.604,142.037) v1(139.929,142.037)
NetD5_4: D5.4 F1.2 | length 5.6
  Top Layer w0.254: D5.4 132.731,147.253 132.994,146.99 F1.2@135.077,146.99
NetD6_1: D6.1 R36.2 | length 3
  Top Layer w0.254: D6.1 R36.2@85.293,107.34
NetD7_2: D7.2 D8.2 W2.1 | length 19.6
  Top Layer w0.254: W2.1 111.963,142.951 110.16,144.755 ; W2.1@112.014,140.868 112.014,137.617 113.183,136.449 D8.2 ; 110.16,144.755 110.16,147.472 110.16,147.244 110.16,144.755
NetF1_1: F1.1 J3.2 J3.3 | length 15.4
  Top Layer w0.254: F1.1 143.383,147.015 J3.3@145.491,147.015 ; J3.3@145.771,146.761 146.533,146.761 147.574,145.72 148.753,144.541 J3.2 J3.2@148.753,143.855 ; J3.3@145.491,147.015 145.771,146.736 145.711,146.795 J3.3@145.491,147.015
NetH1_1: H1.1 R22.2 | length 6.3
  Top Layer w0.254: H1.1 68.315,75.042 R22.2@68.326,75.032
NetH1_2: H1.2 R23.2 | length 6.7
  Top Layer w0.254: H1.2 R23.2@68.548,80.042 ; R23.2@68.548,80.042 68.58,80.01 68.555,80.035 R23.2@68.548,80.042
NetH1_3: H1.3 R28.2 | length 6.4
  Top Layer w0.254: H1.3 68.399,85.042 R28.2@68.402,85.039
NetH1_4: H1.4 R29.2 | length 6.5
  Top Layer w0.254: H1.4 R29.2@68.53,90.042
NetH2_1: H2.1 U7.2 | length 12.4
  Top Layer w0.254: H2.1 70.982,99.426 71.577,98.831 74.016,98.831 U7.2@74.092,98.908
NetH2_2: H2.2 R37.2 | length 7.9
  Top Layer w0.254: H2.2 63.976,104.426 67.031,101.371 R37.2@68.656,101.371
NetH2_3: H2.3 U6.3 | length 22.1
  Top Layer w0.254: H2.3@61.773,109.398 61.773,109.423 59.665,111.531 59.665,114.783 61.519,116.637 63.195,116.637 64.096,115.736 U6.3
NetH2_4: H2.4 R33.1 | length 6.7
  Top Layer w0.254: H2.4 65.075,114.426 66.294,113.208 R33.1@68.199,113.208
NetH3_1: H3.1 K3.4 | length 7.9
  Top Layer w2: K3.4@143.408,65.303 150.519,65.303 H3.1
NetH3_3: H3.3 K4.4 | length 9.2
  Top Layer w2: K4.4@143.637,79.146 146.676,79.146 H3.3
NetH4_2: H4.2 K1.3 | length 13.1
  Bottom Layer w2: K1.3 H4.2@150.851,103.381 ; H4.2@150.851,103.381 150.851,104.343 150.851,104.045 H4.2@150.851,103.381
NetH4_4: H4.4 K2.3 | length 7.5
  Top Layer w2: K2.3@143.409,114.045 H4.4
NetJ2_2: J2.2 R20.2 R21.2 U5.12 | length 22.8
  Top Layer w0.254: U5.12 143.18,158.979 143.434,159.233 R21.2@144.704,159.233 ; R20.2 144.863,164.255 v1(144.958,164.16) ; R21.2@144.932,159.258 145.186,159.004 v1(147.701,159.004) 149.098,157.607 J2.2@151.257,157.607 ; J2.2@151.409,157.607 J2.2@151.257,157.607 ; J2.2@151.536,157.328 J2.2@151.257,157.607
  Bottom Layer w0.254: v1(144.958,164.16) 147.676,161.442 v1@147.676,159.029
NetJ2_3: J2.3 R16.1 R21.1 U5.13 | length 22.8
  Top Layer w0.254: U5.13 v1@141.834,160.249 ; v1(141.859,160.223) v1@141.834,160.249 ; v1@142.126,160.007 143.078,160.96 R21.1@144.577,160.96 ; R16.1@144.805,152.806 v1(144.805,156.464) ; R21.1 147.845,161.154 149.098,162.408 J2.3@151.384,162.408 ; v1@141.834,160.249 141.859,160.249 v1@141.834,160.249
  Bottom Layer w0.254: v1(141.859,160.223) 141.859,157.048 142.392,156.515 144.755,156.515 v1(144.805,156.464)
NetLED1_1: LED1.1 R9.2 | length 4.1
  Top Layer w0.254: LED1.1@100.413,162.375 R9.2
NetLED2_1: LED2.1 R10.2 | length 3.9
  Top Layer w0.254: LED2.1@105.263,162.58 R10.2
NetLED3_1: LED3.1 R11.1 | length 4
  Top Layer w0.254: LED3.1@110.073,162.494 R11.1
NetLED4_1: LED4.1 R12.2 | length 4.2
  Top Layer w0.254: LED4.1@114.923,162.318 R12.2
NetQ1_1: Q1.1 R1.1 R3.1 | length 16
  Top Layer w0.254: R3.1@116.341,129.651 R1.1 ; R1.1@120.335,129.601 Q1.1 120.345,129.601 R1.1@120.335,129.601
NetQ1_3: Q1.3 R7.2 USBC.1 | length 16.4
  Top Layer w0.254: Q1.3@128.727,128.626 132.029,128.626 USBC.1 ; USBC.1@132.198,132.191 R7.2
NetQ2_1: Q2.1 R26.1 | length 2.8
  Top Layer w0.254: R26.1 Q2.1@124.155,99.619
NetQ3_1: Q3.1 R27.1 | length 2.7
  Top Layer w0.254: R27.1 Q3.1@124.511,118.847
NetQ4_1: Q4.1 R34.1 | length 4.1
  Top Layer w0.254: R34.1 Q4.1@111.201,66.243
NetQ5_1: Q5.1 R35.1 | length 4.8
  Top Layer w0.254: R35.1 Q5.1@111.887,80.264
NetR4_2: R4.2 USBC.2 | length 5.3
  Top Layer w0.254: USBC.2 134.572,135.029 135.484,135.941 R4.2@135.484,137.389
NetR15_2: R15.2 U3.2 | length 4.8
  Top Layer w0.254: R15.2@73.254,160.35 73.254,161.671 73.381,161.798 74.117,161.798 74.727,162.408 U3.2
NetR18_2: R18.2 W1.2 | length 4.3
  Top Layer w0.254: W1.2 R18.2@65.532,156.515
NetR32_1: R32.1 U6.1 | length 3.1
  Top Layer w0.254: U6.1 R32.1@84.948,113.222
NetR33_2: R33.2 U6.4 | length 3.2
  Top Layer w0.254: R33.2 U6.4@73.736,113.233
NetR37_1: R37.1 U7.1 | length 2.7
  Top Layer w0.254: R37.1 U7.1@73.762,101.498
PIO0_0: P1.15 Reset.3 Reset.4 U1.1 U2.3 U5.7 | length 238.8
  Top Layer w0.254: 61.468,140.741 61.062,140.741 59.842,141.961 59.842,145.415 62.179,147.752 v1(70.739,147.752) ; Reset.3@61.772,135.84 U1.1 ; Reset.4 58.792,127.27 57.429,125.908 57.429,75.286 64.973,67.742 81.813,67.742 v1@82.042,67.513 ; Reset.4@61.779,127.489 Reset.3 ; P1.15 v1(82.116,67.337) ; v1(85.395,73.152) 88.265,73.152 v1(88.316,73.101) ; v1(92.126,88.925) 99.847,88.925 100.552,89.63 101.479,89.63 101.514,89.665 101.585,89.665 102.613,90.693 102.613,90.764 102.667,90.818 102.667,97.053 102.133,97.587 U2.3@100.736,97.587 ; v1(131.47,156.489) 131.521,156.439 U5.7
  Bottom Layer w0.254: v1(70.739,147.752) 70.968,147.98 77.927,147.98 86.563,156.616 v1@131.47,156.616 ; v1(82.116,67.337) 85.395,70.616 v1(85.395,73.152) ; v1(88.316,73.101) 91.465,73.101 92.126,73.762 v1(92.126,88.925)
PIO0_1: R17.1 U2.4 W1.1 | length 85.9
  Top Layer w0.254: W1.1 61.273,152.468 62.162,151.579 R17.1@65.591,151.579 ; R17.1 65.853,149.869 66.497,149.225 69.24,149.225 v1(69.291,149.174) ; v1(73.152,134.493) 73.228,134.417 73.228,133.807 74.828,132.207 v1(84.963,132.207) ; v1(89.281,108.61) 92.71,108.61 94.056,107.264 v1(94.005,107.264) ; v1(95.91,98.196) 96.027,98.08 U2.4
  Bottom Layer w0.254: v1(69.291,149.174) 69.291,146.253 73.152,142.392 v1(73.152,134.493) ; v1(84.963,132.207) 84.963,132.182 89.281,127.864 v1(89.281,108.61) ; v1(94.005,107.264) 94.056,107.264 94.428,106.892 94.412,106.875 94.412,99.695 v1(95.91,98.196)
PIO0_2: U2.10
PIO0_3: R13.1 R14.2 U2.14 | length 22.7
  Top Layer w0.254: U2.14@98.45,103.632 v1(98.45,105.054) ; v1(98.476,108.433) 98.476,122.352 R13.1@98.552,122.428 ; R13.1@98.755,122.546 R14.2@102.676,122.546
  Bottom Layer w0.254: v1@98.476,105.054 v1(98.476,108.433)
PIO0_4: U2.15
PIO0_5: U2.16
PIO0_6: R3.2 U2.22 | length 42.8
  Top Layer w0.254: U2.22@94.488,103.632 94.488,105.994 95.606,107.112 95.606,111.404 96.774,112.573 96.774,126.873 99.517,129.616 R3.2
PIO0_7: U2.23
PIO0_8: U2.27
PIO0_9: P1.13 U2.28 | length 59.8
  Top Layer w0.254: P1.13 84.656,63.117 v1(84.709,63.17) ; v1(86.919,79.705) 86.919,89.306 86.385,89.84 ; v1(87.528,101.143) 88.798,101.143 89.357,100.584 U2.28@91.491,100.584 ; 86.385,89.84 86.385,92.786 86.385,89.84
  Bottom Layer w0.254: v1(84.709,63.17) 86.919,65.38 v1(86.919,79.705) ; v1(87.528,101.143) v1@87.528,101.067 ; 86.385,100.381 86.385,92.786 86.385,100.381 ; 86.385,100.381 87.071,101.067 ; 87.071,101.067 v1@87.528,101.067 ; 87.071,101.067 v1@87.528,101.067
  other v1: 86.487,92.786
PIO0_10: P1.9 R6.1 U2.29 | length 47.9
  Top Layer w0.254: v1@87.579,99.924 87.747,100.092 91.551,100.092 U2.29@91.567,100.076 ; P1.9 89.736,60.094 90.018,60.376 90.018,80.213 91.059,81.255 v1(91.059,93.32)
  Bottom Layer w0.254: v1@87.579,99.924 88.163,99.924 91.059,97.028 91.059,94.83 91.075,94.815 91.075,93.335 v1(91.059,93.32)
  other v1: 87.579,99.974
PIO0_11: C10.2 R22.1 R24.2 U2.32 | length 46.6
  Top Layer w0.254: R22.1 72.501,75.022 72.923,74.6 C10.2@75.667,74.6 ; R24.2 83.283,74.24 90.322,81.28 90.322,94.488 v1(90.348,94.513) ; R24.2@80.721,74.193 78.207,74.193 77.699,74.701 C10.2@75.768,74.701 ; v1@87.579,98.628 v1@87.655,98.552 ; v1@87.655,98.577 U2.32@91.694,98.577 ; C10.2@75.667,74.6 C10.2@75.768,74.701 ; C10.2@75.667,74.6 C10.2@75.768,74.701
  Bottom Layer w0.254: v1@87.579,98.654 88.189,98.654 90.348,96.495 v1(90.348,94.513)
  other v1: 87.554,98.654
PIO1_0: C11.2 R23.1 R25.2 U2.33 | length 39.4
  Top Layer w0.254: R23.1 72.601,80.079 73.025,79.654 C11.2@75.565,79.654 ; R25.2@80.467,79.375 80.416,79.426 78.207,79.426 77.876,79.756 C11.2@75.667,79.756 ; R25.2 v1(82.63,79.397) ; v1@87.605,97.485 88.163,98.044 U2.33@91.465,98.044 ; v1(89.002,90.399) v1(89.002,93.269) ; C11.2@75.565,79.654 C11.2@75.667,79.756 ; C11.2@75.565,79.654 75.636,79.725 C11.2@75.667,79.756
  Bottom Layer w0.254: v1(82.63,79.397) 84.858,79.397 89.052,83.591 89.052,90.348 v1(89.002,90.399) ; v1@87.605,97.485 88.036,97.485 89.002,96.52 v1(89.002,93.269)
  other v1: 87.274,97.384
PIO1_1: C12.2 R28.1 R30.2 U2.34 | length 40.2
  Top Layer w0.254: R28.1 72.771,85.039 73.101,84.709 75.616,84.709 C12.2@75.641,84.684 ; R30.2 v1(82.673,84.451) ; R30.2@80.696,84.531 R30.2@80.67,84.506 ; v1(87.554,90.424) v1(87.554,93.294) ; v1@87.605,96.266 88.925,97.587 U2.34@91.618,97.587 ; C12.2@75.641,84.684 77.978,84.684 ; C12.2@75.641,84.684 77.978,84.684 ; 77.978,84.684 78.156,84.506 ; 78.156,84.506 R30.2@80.67,84.506 ; 78.156,84.506 80.543,84.506 R30.2@80.67,84.506
  Bottom Layer w0.254: v1(82.673,84.451) 82.728,84.506 85.319,84.506 87.554,86.741 v1(87.554,90.424) ; v1@87.605,96.266 v1@87.554,96.215 ; v1@87.554,96.215 v1(87.554,93.294) 87.554,96.114 v1@87.554,96.215
  other v1: 87.605,96.114
PIO1_2: C13.2 R29.1 R31.2 U2.35 | length 28.9
  Top Layer w0.254: R29.1 73.249,90.022 73.457,89.814 ; R31.2@80.391,89.611 78.207,89.611 78.003,89.814 ; R31.2 82.245,89.561 85.708,93.024 85.708,93.067 89.721,97.079 U2.35@91.643,97.079 ; 73.457,89.814 78.003,89.814 ; 73.457,89.814 75.641,89.814 78.003,89.814
PIO1_3: C7.2 P1.7 R2.2 R15.1 U2.39 | length 121
  Top Layer w0.254: R15.1 77.088,157.961 v1(77.088,140.26) ; P1.7 92.543,58.482 94.078,60.017 ; v1(93.345,93.269) 94.437,94.361 U2.39@94.437,94.691 ; v1(93.599,87.3) 95.068,85.831 R2.2 ; 94.107,60.046 94.078,60.017 ; R2.2@95.072,62.205 95.072,60.528 94.561,60.017 94.078,60.017
  Bottom Layer w0.254: v1(77.088,140.26) 77.088,103.786 77.8,103.073 88.824,103.073 89.56,102.337 89.56,101.143 91.694,99.009 91.694,95.821 91.526,95.653 91.526,95.006 92.075,94.456 ; 92.1,94.437 93.269,93.269 v1(93.345,93.269) 93.345,87.554 v1(93.599,87.3)
PIO1_4: U2.40
PIO1_5: U2.45 U5.4 U5.5 | length 113.9
  Top Layer w0.254: U2.45@97.46,94.844 97.46,94.209 99.667,92.001 100.15,92.001 v1@101.117,91.034 ; v1(116.129,89.789) 119.177,89.789 125.273,95.885 v1(128.803,95.885) ; v1(125.882,154.94) 125.882,159.004 v1(125.908,159.029) v1(129.083,159.029) ; v1(131.089,159.055) 133.782,159.055 U5.5@133.807,159.029 ; U5.5@134.201,158.966 U5.5 U5.4
  Bottom Layer w0.254: v1@101.117,91.034 102.464,89.687 116.027,89.687 v1(116.129,89.789) ; v1(125.882,154.94) 125.73,154.788 125.73,139.471 121.26,135.001 121.26,120.371 128.803,112.827 v1(128.803,95.885) ; v1(129.083,159.029) 131.115,159.029 v1(131.089,159.055)
  other v1: 101.016,90.983
PIO1_6: U2.46 U5.3 | length 142.7
  Top Layer w0.254: U2.46 97.95,94.374 99.869,92.455 101.372,92.455 v1@101.422,92.405 ; v1(110.312,92.583) 110.481,92.414 113.115,92.414 v1(113.284,92.583) ; v1(113.284,105.613) 113.284,114.173 115.57,116.459 117.881,116.459 120.447,113.894 v1(129.87,113.894) ; v1(133.096,152.984) 131.089,152.984 130.124,153.949 130.124,160.325 130.277,160.477 132.232,160.477 132.232,161.519 U5.3
  Bottom Layer w0.254: 101.591,92.574 v1@110.303,92.574 ; v1(113.284,92.583) v1(113.284,105.613) ; v1(129.87,113.894) 130.505,113.894 131.067,114.456 132.573,114.456 133.321,115.204 133.321,119.059 137.125,122.863 145.418,122.863 146.86,124.304 146.86,143.812 148.615,145.567 148.615,147.65 147.295,148.971 144.221,148.971 141.453,146.202 134.645,146.202 133.096,147.752 133.096,152.73 v1@133.071,152.756
  other v1: 101.295,92.304
PIO1_7: U2.47 U5.6 | length 126.5
  Top Layer w0.254: U2.47@98.45,95.209 98.45,94.515 99.062,93.904 101.27,93.904 101.422,93.751 v1@101.422,93.675 ; v1(110.363,93.701) 110.338,93.701 110.287,93.751 111.531,93.751 v1@112.192,93.091 ; v1@111.963,105.613 112.166,105.613 112.039,105.74 112.039,105.816 112.293,106.07 112.293,113.894 115.468,117.069 118.085,117.069 120.269,114.884 128.575,114.884 v1(128.6,114.91) ; v1@132.486,157.734 U5.6@133.782,157.734
  Bottom Layer w0.254: v1@101.422,93.675 110.211,93.675 110.287,93.751 110.338,93.701 v1(110.363,93.701) ; v1@111.963,105.613 112.166,105.613 111.887,105.334 112.192,105.029 v1@112.192,93.091 ; v1(128.6,114.91) 132.314,114.91 132.817,115.412 132.817,118.821 ; v1@132.334,157.556 132.334,145.72 132.994,145.059 144.831,145.059 ; 132.817,118.821 132.817,119.198 136.937,123.317 145.205,123.317 146.356,124.468 146.356,143.56 144.881,145.035
  other v1: 112.192,93.294 101.321,93.624 111.963,105.588 132.207,157.683
PIO1_8: U2.9
PIO1_9: U2.17
PIO1_10: U2.30
PIO1_11: U2.42
PIO2_0: LED1.2 U2.2 | length 93.8
  Top Layer w0.254: U2.2 101.294,97.08 101.676,96.698 v1(101.676,96.444) ; v1(100.406,154.076) 100.406,154.965 ; 100.408,154.989 LED1.2 ; v1(109.626,99.797) 110.592,100.762 115.799,100.762 118.085,103.048 118.085,110.871 114.859,114.097 v1(114.757,114.097) ; v1(110.287,122.149) 110.287,125.4 v1(110.363,125.476)
  Bottom Layer w0.254: v1(100.406,154.076) 100.457,154.127 105.486,154.127 106.223,153.391 106.223,138.532 104.978,137.287 104.978,130.861 v1(110.363,125.476) ; v1(101.676,96.444) 103.175,94.945 104.902,94.945 105.613,95.656 105.613,98.552 106.832,99.771 109.601,99.771 v1(109.626,99.797) ; v1(110.287,122.149) 110.287,115.138 111.328,114.097 v1(114.757,114.097)
PIO2_1: LED2.2 U2.13 | length 67.8
  Top Layer w0.254: U2.13 98.95,104.259 99.797,105.105 v1(99.797,105.258) ; v1@105.263,152.984 LED2.2
  Bottom Layer w0.254: v1(99.797,105.258) 99.797,113.005 106.985,120.193 106.985,121.006 106.858,121.133 100.457,121.133 ; 100.406,121.133 100.457,121.133 ; v1@105.232,152.857 105.232,145.288 100.457,140.513 100.457,121.133
  other v1: 105.258,152.883
PIO2_2: LED3.2 U2.26 | length 82.8
  Top Layer w0.254: v1@90.449,101.58 U2.26 ; v1@110.093,155.804 LED3.2
  Bottom Layer w0.254: v1(90.424,101.575) 90.424,128.448 87.579,131.293 87.579,154.991 88.443,155.854 110.033,155.854 v1(110.084,155.804)
PIO2_3: LED4.2 U2.38 | length 85.8
  Top Layer w0.254: v1(93.751,97.028) v1@93.895,97.028 ; v1@93.904,97.028 v1@93.895,97.028 ; U2.38 93.95,96.973 v1@93.895,97.028 ; v1(114.884,155.042) 114.884,155.575 114.923,155.536 ; LED4.2 114.923,155.536 ; v1@114.935,155.118 114.935,155.524 114.923,155.536
  Bottom Layer w0.254: v1(93.751,97.028) 93.015,97.765 93.015,153.035 95.021,155.042 v1(114.884,155.042)
PIO2_4: R26.2 U2.18 | length 32.4
  Top Layer w0.254: U2.18 96.45,104.172 98.885,106.607 105.947,106.607 v1(105.994,106.655) ; v1@116.357,99.619 R26.2
  Bottom Layer w0.254: v1(105.994,106.655) 113.182,106.655 114.021,107.493 115.875,107.493 116.332,107.036 v1@116.332,99.873
  other v1: 116.357,99.746
PIO2_5: R27.2 U2.21 | length 35.2
  Top Layer w0.254: U2.21@94.971,103.937 94.971,105.45 96.749,107.228 v1(96.749,108.483) ; v1(102.362,118.872) 102.438,118.796 v1@111.43,118.796 ; v1(118.135,118.847) R27.2
  Bottom Layer w0.254: v1(96.749,108.483) 96.749,111.404 102.362,117.018 v1(102.362,118.872) ; v1@111.76,118.847 v1(118.135,118.847)
  other v1: 111.557,118.796
PIO2_6: R34.2 U2.1 | length 34
  Top Layer w0.254: U2.1@100.279,96.571 100.279,95.86 100.863,95.275 v1@100.914,95.275 ; v1(100.559,87.884) 100.559,68.936 103.251,66.243 R34.2
  Bottom Layer w0.254: v1(100.559,87.884) 100.559,89.662 100.203,90.018 100.203,92.862 100.559,93.218 100.559,94.539 101.092,95.072 v1@101.092,95.123
  other v1: 101.194,95.199
PIO2_7: R35.2 U2.11 | length 43.1
  Top Layer w0.254: U2.11@100.825,101.587 101.409,101.587 v1(102.362,102.54) ; R35.2 v1@105.121,90.856
  Bottom Layer w0.254: v1(102.362,102.54) 102.362,102.591 104.623,104.851 105.893,104.851 106.934,105.893 111.125,105.893 111.125,91.923 110.185,90.983 v1@105.105,90.983
  other v1: 105.105,90.932
PIO2_8: R32.2 U2.12 | length 24.2
  Top Layer w0.254: R32.2@87.224,113.182 v1(94.005,113.182) ; v1@95.453,101.702 95.529,101.625 98.273,101.625 98.727,102.08 U2.12
  Bottom Layer w0.254: v1(94.005,113.182) 93.624,112.801 93.624,109.068 95.453,107.239 v1@95.453,101.702
  other v1: 95.428,101.625
PIO2_9: U2.24
PIO2_10: U2.25
PIO2_11: D6.2 U2.31 U7.4 | length 12.2
  Top Layer w0.254: U7.4 D6.2@85.001,101.435 ; D6.2@85.877,101.524 86.563,101.524 87.224,102.184 88.163,102.184 v1@88.189,102.21 ; v1(90.246,99.365) 90.246,99.339 90.195,99.289 90.373,99.289 90.582,99.08 U2.31
  Bottom Layer w0.254: v1@88.316,102.159 89.078,102.159 89.078,100.406 90.195,99.289 90.246,99.339 v1(90.246,99.365)
  other v1: 88.24,102.235
PIO3_0: R19.1 U2.36 U4.2 | length 80.4
  Top Layer w0.254: R19.1@84.582,159.258 84.582,160.96 85.293,161.671 U4.2 ; U2.36 92.175,95.277 92.177,95.275 v1(92.253,95.352) ; 84.607,156.667 84.607,159.309 84.607,159.089 84.607,156.667 ; 84.607,156.667 86.614,154.661 ; 86.614,154.661 88.773,154.661 88.519,154.661 86.614,154.661
  Bottom Layer w0.254: v1(92.253,95.352) 92.177,95.275 92.177,128.956 88.544,132.588 v1@88.544,154.432 ; v1@88.544,154.432 88.773,154.661 88.595,154.483 v1@88.544,154.432
  other v1: 88.519,154.559
PIO3_1: U2.37
PIO3_2: U2.43
PIO3_3: U2.48
VBUS: D8.1 J1.1 R13.2 | length 67.5
  Top Layer w0.254: R13.2@98.654,124.562 v1(101.498,124.562) ; v1@118.777,120.415 118.777,120.669 v1(119.05,120.396) 119.431,120.777 121.996,120.777 v1(122.352,121.133) ; v1(122.301,133.655) D8.1@122.301,136.169 ; v1(145.009,124.511) J1.1
  Bottom Layer w0.254: v1(101.498,124.562) 107.62,124.562 108.814,123.368 110.871,123.368 113.843,120.396 v1(119.05,120.396) ; v1(122.301,133.655) 122.301,124.511 ; v1(122.352,121.133) 122.301,121.184 122.301,124.511 ; v1(145.009,124.511) 122.301,124.511
VCC5: C9.2 C17.2 D1.2 D2.2 D3.2 D4.2 K1.2 K2.2 K3.8 K4.8 R19.2 R20.1 R36.1 U4.3 U5.16 VR2.2 VR2.4 | length 273
  Top Layer w0.254: v1@83.312,109.906 v1(83.16,109.753) R36.1@85.293,109.753 ; 83.642,140.868 86.97,140.868 87.503,141.402 87.503,149.098 ; R36.1@85.395,109.779 v1@94.666,109.779 ; C17.2@85.801,149.555 85.801,151.689 87.401,153.289 89.154,153.289 90.805,154.94 90.805,157.48 89.357,158.928 R19.2@86.436,158.928 ; C17.2@85.852,149.098 87.503,149.098 ; R19.2@86.665,159.055 R19.2@86.665,159.088 ; R19.2@86.681,159.089 R19.2@86.665,159.089 ; R19.2@86.927,158.826 R19.2@86.665,159.088 ; v1(91.161,164.059) 86.665,164.059 R19.2@86.665,159.089 ; VR2.2 VR2.4 87.503,149.098 ; v1(99.822,117.627) 99.873,117.678 v1(112.649,117.678) ; D3.2 116.835,56.622 K3.8@117.958,57.745 ; D4.2 116.802,70.726 K4.8@117.881,71.806 ; v1@116.611,114.503 v1(116.637,114.503) ; v1@116.776,114.338 123.297,107.817 D2.2 129.317,107.817 130.993,106.141 K2.2@130.993,104.414 ; K4.8@117.869,71.26 120.599,68.529 120.599,60.286 K3.8 ; K4.8 118.118,73.896 126.365,82.144 D1.2@126.365,88.925 ; D1.2 129.569,89.175 131.216,87.528 K1.2@131.216,85.09 ; K1.2 133.782,87.612 133.782,101.498 K2.2@131.293,103.988 ; v1(138.938,166.98) 138.989,166.929 U5.16@138.989,164.135 ; U5.16 140.487,164.059 140.97,164.541 C9.2@141.961,164.541 ; C9.2@142.088,164.592 142.088,165.456 142.863,166.231 R20.1 ; R19.2@86.665,159.088 R19.2@86.665,159.089 ; R19.2@86.665,159.088 R19.2 R19.2@86.665,159.089
  Bottom Layer w0.254: v1(83.16,109.753) 83.236,109.83 v1(83.236,140.894) ; v1(91.161,164.059) 124.562,164.059 127.584,167.081 138.938,167.081 v1(138.938,166.98) ; v1(94.691,109.779) 94.691,112.522 ; 94.742,112.547 v1(99.822,117.627) ; v1(112.649,117.678) 112.649,117.704 114.732,115.621 115.494,115.621 ; 115.519,115.621 v1(116.637,114.503)
VCC33: C1.2 C2.2 C3.2 C4.2 C8.1 C15.2 P1.1 P1.2 Q1.2 R1.2 R2.1 R9.1 R10.1 R11.2 R12.1 R14.1 R17.2 U1.2 U2.8 U2.44 U3.1 U5.1 VR1.2 VR1.4 | length 309.4
  Top Layer w0.254: U1.2 C1.2@67.641,140.563 ; C1.2@67.742,140.564 72.974,140.564 ; R17.2@67.97,151.46 70.104,151.46 70.18,151.536 ; U3.1@73.355,164.109 71.755,164.109 70.18,162.535 70.18,151.536 ; U3.1@73.406,164.465 73.406,166.218 73.777,166.588 C4.2 73.777,169.662 74.742,170.627 76.744,170.627 78.892,168.478 114.935,168.478 R12.1@115.037,168.58 ; C15.2@85.75,138.024 74.473,138.024 72.974,139.522 72.974,140.564 ; C15.2 88.555,137.881 89.002,138.328 90.957,138.328 VR1.4@91.008,138.278 ; VR1.4@91.084,138.278 93.878,138.278 ; v1(93.904,137.236) 93.878,137.262 93.878,138.278 ; VR1.2 93.878,138.278 ; U2.44@96.952,94.767 96.952,92.536 97.068,92.42 v1(97.068,89.876) ; R2.1 v1@97.068,86.843 ; R2.1@97.206,62.128 98.704,62.128 99.924,60.909 99.924,58.598 99.896,58.57 P1.1 P1.2 ; U2.8@100.432,100.076 100.447,100.092 102.657,100.092 102.829,100.264 C2.2 104.47,102.032 v1(104.572,102.133) ; R14.1@104.745,122.601 R14.1@105.283,122.601 ; v1(104.8,120.244) R14.1@104.8,122.199 ; R14.1@105.283,122.606 105.826,122.606 110.703,127.483 R1.2@119.812,127.483 ; 106.426,123.165 v1(107.925,121.666) ; v1@106.934,104.648 106.934,108.458 v1(108.179,109.703) ; R12.1 130.133,168.495 130.543,168.084 ; R1.2@120.533,127.701 Q1.2 ; C8.1 U5.1@133.873,164.12 ; C8.1@130.543,164.198 130.543,168.084 ; 130.581,168.046 130.543,168.084 ; 70.18,151.536 73.025,148.692 73.025,140.614 72.974,140.564
  Bottom Layer w0.254: v1(93.904,137.236) 93.904,121.031 94.666,120.269 104.775,120.269 v1(104.8,120.244) ; v1(97.053,86.868) 114.833,86.868 117.373,89.408 117.373,109.677 117.221,109.83 v1@108.179,109.83 ; v1@97.068,86.995 v1(97.068,89.876) ; v1(104.572,102.133) 106.883,104.445 106.883,104.546 106.934,104.597 v1@106.934,104.648 ; v1(107.925,121.666) 108.179,121.412 v1@108.179,109.83 ; v1(108.179,109.703) v1@108.179,109.83
  other v1: 106.985,104.724
pads on no net: J1.4 J1.6 J1.7 J1.8 J1.9 J1.MH1 J1.MH2 K3.5 K3.6 K4.5 K4.6 P1.3 P1.5 P1.11 P1.17 P1.19 Reset.1 U5.10 U5.11 U5.14

## Keep-outs
Keep-Out Layer:
  the board outline again, w0.254

## Text inside footprints (layer, text, board x,y; h text height)
D5: Top Overlay "~" at 128.702,147.32 h1.5 r90; Top Overlay "~" at 128.702,140.97 h1.5 r90; Top Overlay "-" at 122.987,141.097 h1.5 r90; Top Overlay "+" at 123.114,147.32 h1.5 r90
J1: Mechanical 1 "PCB Edge" at 156.685,122.075 h0.25 r90
J3: Mechanical 1 "Mech 2 - Clearance, move to internal plane if present" at 155.967,136.971 h0.3 r180; Mechanical 1 "Mech 1 - Slot cut-out" at 155.967,136.471 h0.3 r180; Mechanical 1 "Assign keep-out area to slot" at 155.967,135.471 h0.3 r180; Mechanical 1 "Alert PCB fab to slot details" at 155.967,135.971 h0.3 r180
P1: Top Overlay "20" at 71.321,56.577 h1.27 r180; Top Overlay "19" at 71.321,59.117 h1.27 r180; Top Overlay "1" at 106.119,58.99 h1.27 r180; Top Overlay "2" at 106.373,56.323 h1.27 r180
U3: Top Overlay "1" at 72.727,161.729 h1.5 r270; Top Overlay "3" at 75.247,162.019 h1.5 r270
U4: Top Overlay "3" at 85.813,161.969 h1.5 r270; Top Overlay "1" at 83.293,161.679 h1.5 r270